# Altium PCB Carrier_Board_Template.PcbDoc
Units mm, origin at the board's own origin, x right, y up, seen from the top; angles counter-clockwise.
Board outline 100 x 100 mm, 2 copper layers (Top Layer, Bottom Layer); 108 components, 74 nets, 425 pads, 0 vias.
Unrouted connection lines stored in the file: 233.
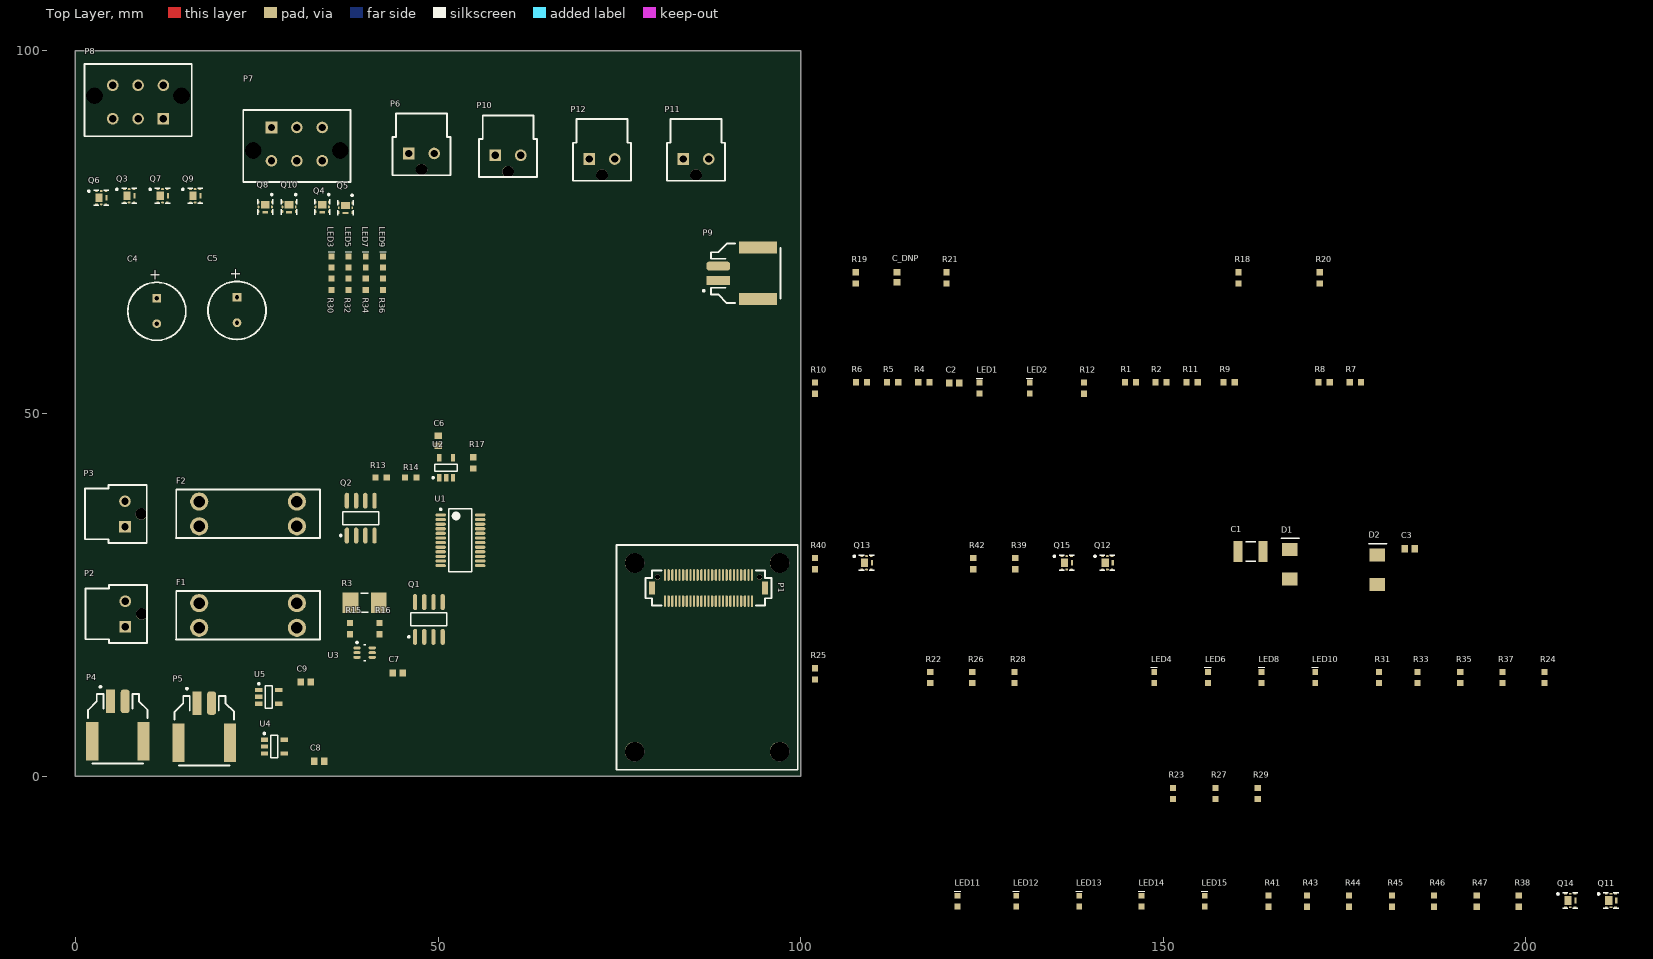
[diagram p0: Top Layer view]
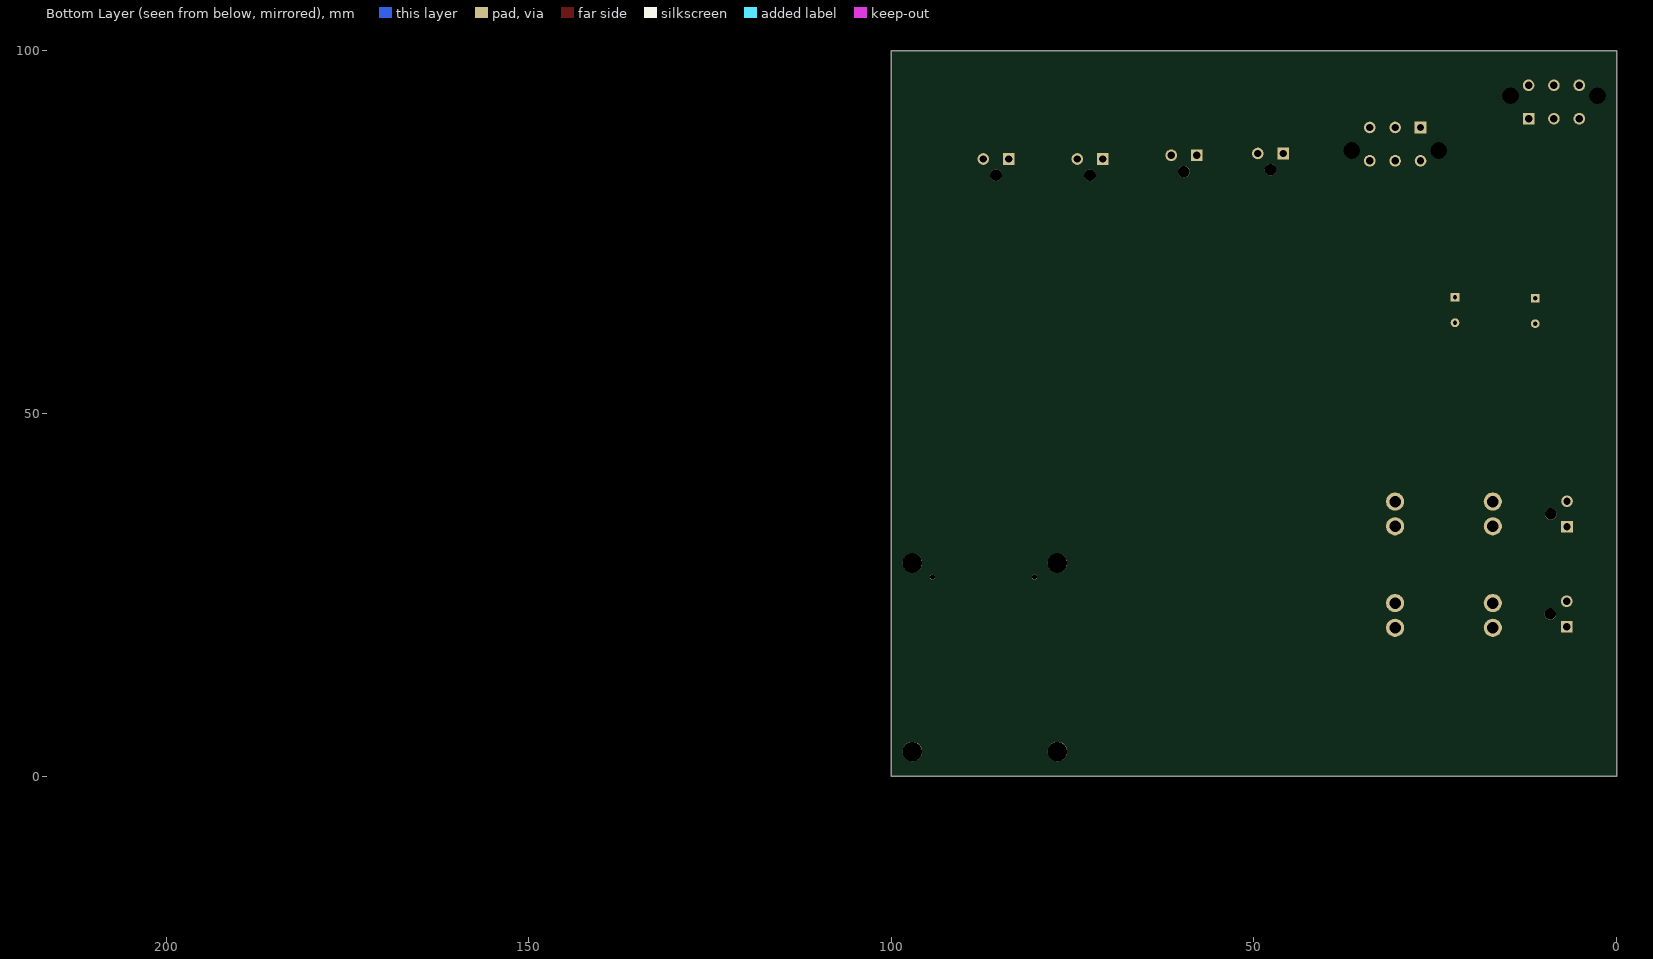
[diagram p1: Bottom Layer view, seen from below]

## Layer stack, top to bottom
Top Solder: solder mask 0.0102, Solder Resist, Dk 3.5
Top Layer: signal copper 0.0356
Dielectric 1: dielectric 0.32, FR-4, Dk 4.8
Bottom Layer: signal copper 0.0356
Bottom Solder: solder mask 0.0102, Solder Resist, Dk 3.5

## Board outline
0,0 100,0 100,100 0,100

## Design rules (kind name [scope] priority, off if disabled: settings)
Clearance [All] p1: gap=0.254
PolygonConnect [All] p1: connectstyle=Relief reliefconductorwidth=0.254 reliefentries=4 polygonreliefangle="90 Angle" airgapwidth=0.254
RoutingVias [All] p1: holewidth=0.711 width=1.27 viastyle="Through Hole" minholewidth=0.711 minwidth=1.27 maxholewidth=0.711 maxwidth=1.27
SolderMaskExpansion [All] p1: expansion=0.102
Width [All] p1: maxlimit=0.254 minlimit=0.254 preferedwidth=0.254
30 further rules are at their usual default settings.

## Classes and differential pairs
component class Sensing: C6 C7 C8 C9 C_DNP P4 P5 R13 R14 R15 R16 R17 R18 R19 R20 R21 U2 U3 U4 U5
component class PowerPath: C1 C2 C3 C4 C5 D1 D2 F1 F2 LED1 LED2 P2 P3 Q1 Q2 R1 R2 R3 R4 R5 R6 R7 R8 R9 R10 R11 R12 U1
component class MiscBoard_Switching: LED11 LED12 LED13 LED14 LED15 P6 P9 P10 P11 P12 Q11 Q12 Q13 Q14 Q15 R38 R39 R40 R41 R42 R43 R44 R45 R46 R47
component class Front&Roof_Enclosure: LED3 LED4 LED5 LED6 LED7 LED8 LED9 LED10 P7 P8 Q3 Q4 Q5 Q6 Q7 Q8 Q9 Q10 R22 R23 R24 R25 R26 R27 R28 R29 R30 R31 R32 R33 R34 R35 R36 R37
component class Controller_Board_Interface: P1

## Components (designator, comment, footprint, x,y, rotation, side; value= is the part's Value field where it differs from the comment)
C1 "CAP CER 22UF 16V ±20% X5R 1210" "CAP, 1210" 162.06,30.988 r0 top
C2 "CAP CER 0.1UF 50V 10% X7R 0603" "CAP, 0603" 121.2,54.2 r0 top
C3 "CAP CER 0.1UF 50V 10% X7R 0603" "CAP, 0603" 184.016,31.34 r0 top
C4 "CAP ALUM 100UF 20% 50V RADIAL" "CAP ALUM 100UF 50V" 11.219,65.888 r270 top
C5 "CAP ALUM 100UF 20% 50V RADIAL" "CAP ALUM 100UF 50V" 22.276,66.009 r270 top
C6 "CAP CER 0.1UF 50V 10% X7R 0603" "CAP, 0603" 50.038,46.228 r90 top
C7 "CAP CER 0.1UF 50V 10% X7R 0603" "CAP, 0603" 44.45,14.224 r0 top
C8 "CAP CER 0.1UF 50V 10% X7R 0603" "CAP, 0603" 33.615,2.032 r0 top
C9 "CAP CER 0.1UF 50V 10% X7R 0603" "CAP, 0603" 31.75,12.954 r0 top
C_DNP "CAP CER 0.1UF 50V 10% X7R 0603" "CAP, 0603" 113.3,68.8 r90 top
D1 "DIODE TVS 15VWM 24.4VC DO-214AA (SMB)" "DO-214AA Diode" 167.46,27.188 r90 top
D2 "DIODE TVS 15VWM 24.4VC DO-214AA (SMB)" "DO-214AA Diode" 179.516,26.44 r90 top
F1 "?A" "FUSE ATO/ATC FUSE HOLDER" 17.069,20.447 r0 top
F2 "?A" "FUSE ATO/ATC FUSE HOLDER" 17.069,34.443 r0 top
LED1 "LED GREEN CLEAR 2V 0603" LED_0603 124.7,52.8 r90 top
LED2 "LED YELLOW CLEAR 2.1V 0603" LED_0603 131.6,52.8 r90 top
LED3 "LED GREEN CLEAR 2V 0603" LED_0603 35.316,70.178 r90 top
LED4 "LED GREEN CLEAR 2V 0603" LED_0603 148.778,12.892 r90 top
LED5 "LED GREEN CLEAR 2V 0603" LED_0603 37.683,70.178 r90 top
LED6 "LED YELLOW CLEAR 2.1V 0603" LED_0603 156.178,12.892 r90 top
LED7 "LED YELLOW CLEAR 2.1V 0603" LED_0603 40.051,70.178 r90 top
LED8 "LED YELLOW CLEAR 2.1V 0603" LED_0603 163.578,12.892 r90 top
LED9 "LED YELLOW CLEAR 2.1V 0603" LED_0603 42.418,70.178 r90 top
LED10 "LED YELLOW CLEAR 2.1V 0603" LED_0603 170.978,12.892 r90 top
LED11 "LED GREEN CLEAR 2V 0603" LED_0603 121.64,-17.96 r90 top
LED12 "LED GREEN CLEAR 2V 0603" LED_0603 129.74,-17.96 r90 top
LED13 "LED YELLOW CLEAR 2.1V 0603" LED_0603 138.44,-17.96 r90 top
LED14 "LED YELLOW CLEAR 2.1V 0603" LED_0603 147.04,-17.96 r90 top
LED15 "LED YELLOW CLEAR 2.1V 0603" LED_0603 155.74,-17.96 r90 top
P1 "CONN 50POS Bergstak Plug 0.02\"" "CONN, Bergstak 50 Pos Plug" 87.308,25.924 r270 top
P2 "CONN 2POS ULTRA-FIT 0.138\"" "CONN, 2POS ULTRA-FIT" 6.883,20.605 r90 top
P3 "CONN 2POS ULTRA-FIT 0.138\"" "CONN, 2POS ULTRA-FIT" 6.833,34.393 r90 top
P4 "CONN 2POS DURA-CLIK 0.079\"" "CONN, 2POS Dura-Click" 4.848,10.306 r0 top
P5 "CONN 2POS DURA-CLIK 0.079\"" "CONN, 2POS Dura-Click" 16.774,10.052 r0 top
P6 "CONN 2POS ULTRA-FIT 0.138\"" "CONN, 2POS ULTRA-FIT" 45.974,85.852 r0 top
P7 "CONN 6POS ULTRA-FIT 0.138\"" "CONN, 6POS ULTRA-FIT" 27.036,89.436 r0 top
P8 "CONN 6POS ULTRA-FIT 0.138\"" "CONN, 6POS ULTRA-FIT" 12.136,90.65 r180 top
P9 "CONN 2POS DURA-CLIK 0.079\"" "CONN, 2POS Dura-Click" 88.646,68.326 r90 top
P10 "CONN 2POS ULTRA-FIT NATURAL COLOR 0.138\"" "CONN, 2POS ULTRA-FIT - NATURAL COLOR" 57.912,85.598 r0 top
P11 "CONN 2POS ULTRA-FIT NATURAL COLOR 0.138\"" "CONN, 2POS ULTRA-FIT - NATURAL COLOR" 83.82,85.09 r0 top
P12 "CONN 2POS ULTRA-FIT 0.138\"" "CONN, 2POS ULTRA-FIT" 70.866,85.09 r0 top
Q1 "MOSFET DUAL P-CH 40V 8A 3.2W 8-SOIC" SOIC8 48.768,21.59 r90 top
Q2 "MOSFET DUAL P-CH 40V 8A 3.2W 8-SOIC" SOIC8 39.37,35.56 r90 top
Q3 "MOSFET N-CH 30V 8.7A 2.1W 6-PQFN (2x2)" "MOSFET N-CH 30V 12A 2mmx2mm PQFN" 7.412,80.01 r0 top
Q4 "MOSFET N-CH 30V 8.7A 2.1W 6-PQFN (2x2)" "MOSFET N-CH 30V 12A 2mmx2mm PQFN" 34.036,78.486 r270 top
Q5 "MOSFET N-CH 30V 8.7A 2.1W 6-PQFN (2x2)" "MOSFET N-CH 30V 12A 2mmx2mm PQFN" 37.247,78.374 r270 top
Q6 "MOSFET N-CH 30V 8.7A 2.1W 6-PQFN (2x2)" "MOSFET N-CH 30V 12A 2mmx2mm PQFN" 3.556,79.756 r0 top
Q7 "MOSFET N-CH 30V 8.7A 2.1W 6-PQFN (2x2)" "MOSFET N-CH 30V 12A 2mmx2mm PQFN" 12.012,80.01 r0 top
Q8 "MOSFET N-CH 30V 8.7A 2.1W 6-PQFN (2x2)" "MOSFET N-CH 30V 12A 2mmx2mm PQFN" 26.162,78.486 r270 top
Q9 "MOSFET N-CH 30V 8.7A 2.1W 6-PQFN (2x2)" "MOSFET N-CH 30V 12A 2mmx2mm PQFN" 16.512,80.01 r0 top
Q10 "MOSFET N-CH 30V 8.7A 2.1W 6-PQFN (2x2)" "MOSFET N-CH 30V 12A 2mmx2mm PQFN" 29.464,78.486 r270 top
Q11 "MOSFET N-CH 30V 8.7A 2.1W 6-PQFN (2x2)" "MOSFET N-CH 30V 12A 2mmx2mm PQFN" 211.74,-17.16 r0 top
Q12 "MOSFET N-CH 30V 8.7A 2.1W 6-PQFN (2x2)" "MOSFET N-CH 30V 12A 2mmx2mm PQFN" 142.3,29.4 r0 top
Q13 "MOSFET N-CH 30V 8.7A 2.1W 6-PQFN (2x2)" "MOSFET N-CH 30V 12A 2mmx2mm PQFN" 109.1,29.4 r0 top
Q14 "MOSFET N-CH 30V 8.7A 2.1W 6-PQFN (2x2)" "MOSFET N-CH 30V 12A 2mmx2mm PQFN" 206.14,-17.16 r0 top
Q15 "MOSFET N-CH 30V 8.7A 2.1W 6-PQFN (2x2)" "MOSFET N-CH 30V 12A 2mmx2mm PQFN" 136.7,29.4 r0 top
R1 "RES 4.7K OHM 1% 1/10W 0603" "RES, 0603" 145.5,54.3 r0 top
R2 "RES 4.7K OHM 1% 1/10W 0603" "RES, 0603" 149.7,54.3 r0 top
R3 "RES 0.003 OHM 1% 1.5W 2010" "RES 2010" 39.878,23.876 r0 top
R4 "RES 1M OHM 1% 1/10W 0603" "RES, 0603" 117,54.3 r0 top
R5 "RES 53.6K OHM 1% 1/10W 0603" "RES, 0603" 112.7,54.3 r0 top
R6 "RES 80.6K OHM 1% 1/10W 0603" "RES, 0603" 108.4,54.3 r0 top
R7 "RES 1M OHM 1% 1/10W 0603" "RES, 0603" 176.5,54.3 r0 top
R8 "RES 29.4K OHM 1% 1/10W 0603" "RES, 0603" 172.2,54.3 r0 top
R9 "RES 80.6K OHM 1% 1/10W 0603" "RES, 0603" 159.1,54.3 r0 top
R10 "RES 255K OHM 1% 1/10W 0603" "RES, 0603" 102,53.5 r90 top
R11 "RES 10K OHM 1% 1/10W 0603" "RES, 0603" 154,54.3 r0 top
R12 "RES 10K OHM 1% 1/10W 0603" "RES, 0603" 139.1,53.5 r90 top
R13 "RES 470K OHM 1% 1/4W 0603" "RES, 0603" 42.164,41.148 r0 top
R14 "RES 140K OHM 1% 1/10W 0603" "RES, 0603" 46.241,41.148 r0 top
R15 "RES 0.0 OHM 1/4W 0603" "RES, 0603" 37.846,20.32 r270 top
R16 "RES 0.0 OHM 1/4W 0603" "RES, 0603" 41.91,20.32 r270 top
R17 "RES 0.0 OHM 1/4W 0603" "RES, 0603" 54.864,43.18 r90 top
R18 "RES 10K OHM 1% 1/10W 0603" "RES, 0603" 160.4,68.7 r90 top
R19 "RES 10K OHM 1% 1/10W 0603" "RES, 0603" 107.6,68.7 r90 top
R20 "RES 0.0 OHM 1/4W 0603" "RES, 0603" 171.6,68.7 r90 top
R21 "RES 0.0 OHM 1/4W 0603" "RES, 0603" 120.1,68.7 r90 top
R22 "RES 10K OHM 1% 1/10W 0603" "RES, 0603" 117.878,13.592 r90 top
R23 "RES 10K OHM 1% 1/10W 0603" "RES, 0603" 151.335,-2.406 r90 top
R24 "RES 10K OHM 1% 1/10W 0603" "RES, 0603" 202.578,13.592 r90 top
R25 "RES 10K OHM 1% 1/10W 0603" "RES, 0603" 102,14.1 r90 top
R26 "RES 10K OHM 1% 1/10W 0603" "RES, 0603" 123.678,13.592 r90 top
R27 "RES 10K OHM 1% 1/10W 0603" "RES, 0603" 157.235,-2.406 r90 top
R28 "RES 10K OHM 1% 1/10W 0603" "RES, 0603" 129.478,13.592 r90 top
R29 "RES 10K OHM 1% 1/10W 0603" "RES, 0603" 163.035,-2.406 r90 top
R30 "RES 4.7K OHM 1% 1/10W 0603" "RES, 0603" 35.297,67.818 r90 top
R31 "RES 4.7K OHM 1% 1/10W 0603" "RES, 0603" 179.778,13.592 r90 top
R32 "RES 4.7K OHM 1% 1/10W 0603" "RES, 0603" 37.671,67.818 r90 top
R33 "RES 4.7K OHM 1% 1/10W 0603" "RES, 0603" 185.078,13.592 r90 top
R34 "RES 4.7K OHM 1% 1/10W 0603" "RES, 0603" 40.044,67.818 r90 top
R35 "RES 4.7K OHM 1% 1/10W 0603" "RES, 0603" 190.978,13.592 r90 top
R36 "RES 4.7K OHM 1% 1/10W 0603" "RES, 0603" 42.418,67.818 r90 top
R37 "RES 4.7K OHM 1% 1/10W 0603" "RES, 0603" 196.778,13.592 r90 top
R38 "RES 10K OHM 1% 1/10W 0603" "RES, 0603" 199.04,-17.26 r90 top
R39 "RES 10K OHM 1% 1/10W 0603" "RES, 0603" 129.6,29.3 r90 top
R40 "RES 10K OHM 1% 1/10W 0603" "RES, 0603" 102,29.3 r90 top
R41 "RES 10K OHM 1% 1/10W 0603" "RES, 0603" 164.54,-17.26 r90 top
R42 "RES 10K OHM 1% 1/10W 0603" "RES, 0603" 123.8,29.3 r90 top
R43 "RES 4.7K OHM 1% 1/10W 0603" "RES, 0603" 169.84,-17.26 r90 top
R44 "RES 4.7K OHM 1% 1/10W 0603" "RES, 0603" 175.64,-17.26 r90 top
R45 "RES 4.7K OHM 1% 1/10W 0603" "RES, 0603" 181.54,-17.26 r90 top
R46 "RES 4.7K OHM 1% 1/10W 0603" "RES, 0603" 187.34,-17.26 r90 top
R47 "RES 4.7K OHM 1% 1/10W 0603" "RES, 0603" 193.24,-17.26 r90 top
U1 "IC OR CONTROLLER SOURCE SELECT 24SSOP" "IC OR CTRLR SRC SELECT 24SSOP" 53.086,32.512 r0 top
U2 "IC OP AMP GEN PURPOSE RR 10MHZ SOT-23-5" "IC OP AMP GP RR 10MHZ SOT-23-5" 51.12,42.523 r90 top
U3 "IC CURRENT AMPLIFIER SC70-6" "IC OP AMP CURR SENSE 80KHZ SC70-6" 39.878,17.018 r0 top
U4 "IC OP AMP GEN PURPOSE RR 10MHZ SOT-23-5" "IC OP AMP GP RR 10MHZ SOT-23-5" 27.432,4.064 r0 top
U5 "IC OP AMP GEN PURPOSE RR 10MHZ SOT-23-5" "IC OP AMP GP RR 10MHZ SOT-23-5" 26.67,10.922 r0 top

## Footprints (in the part's own frame and the unit in brackets; to place one, negate y for a bottom-side part, rotate by r counter-clockwise, add the part's x,y. Pads: shape width x height; smd on the part's side, far side on the other; paste and mask are expansions set on the pad)
"CAP ALUM 100UF 50V" [mm] "CAP ALUM 100UF 20% 50V RADIAL"
  rect 1.2x1.2 hole 0.6: 1(0,0)
  round 1.2 hole 0.6: 2(3.5,0)
  silkscreen extent -2.2,-4 5.8,4, body extent -2.45,-4.25 6.05,4.25, height 12.5
"CAP, 0603" [mm] "Chip Capacitor, 2-Leads, Body 1.60x0.81mm, IPC Medium Density"
  rect 0.9x1 smd mask+0.076: 1(-0.675,0) 2(0.675,0)
  body extent -0.87,-0.48 0.87,0.48, height 0.9
"CAP, 1210" [mm] "Chip Capacitor, 2-Leads, Body 3.20x2.50mm, IPC Low Density"
  rect 1.25x2.9 smd: 1(-1.725,0) 2(1.725,0)
  silkscreen extent -0.7,-1.35 0.7,1.35, body extent -1.8,-1.4 1.8,1.4, height 2.8
"CONN, 2POS Dura-Click" [mm] "WM7169CT-ND"
  rect 1.2x3.2 smd: 1(0,0)
  rrect50% 1.2x3.2 smd: 2(2,0)
  rect 1.7x5.3 smd: ""(-2.55,-5.48) ""(4.55,-5.48)
  silkscreen extent -3.1,-8.6 5.1,2.13, body extent -3,-8.4 5,1, height 6.39
"CONN, 2POS ULTRA-FIT" [mm] "2 Positions Header, Shrouded Connector 0.138\" (3.50mm) Through Hole Gold"
  rect 1.6x1.6 hole 1.02: 1(0,0)
  round 1.6 hole 1.02: 2(3.5,0)
  round 1.6 hole 1.6: ""(1.75,-2.25)
  silkscreen extent -2.25,-3 5.75,5.5, body extent -2.71,-2.85 6.29,5.82, height 13.85
"CONN, 2POS ULTRA-FIT - NATURAL COLOR" [mm] "2 Positions Header, Shrouded Connector 0.138\" (3.50mm) Through Hole Gold"
  rect 1.6x1.6 hole 1.02: 1(0,0)
  round 1.6 hole 1.02: 2(3.5,0)
  round 1.6 hole 1.6: ""(1.75,-2.25)
  silkscreen extent -2.25,-3 5.75,5.5, body extent -2.71,-2.85 6.29,5.82, height 13.85
"CONN, 6POS ULTRA-FIT" [mm]
  rect 1.6x1.6 hole 1.02: 1(0,0)
  round 1.6 hole 1.02: 2(3.5,0) 3(7,0) 4(0,-4.6) 5(3.5,-4.6) 6(7,-4.6)
  round 0 hole 2.3: ""(-2.5,-3.18) ""(9.5,-3.18)
  silkscreen extent -3.9,-7.53 10.9,2.42, body extent -3.55,-8.25 10.55,5.66, height 13.9
"CONN, Bergstak 50 Pos Plug" [mm] "Bergstak 50 Position Plug"
  rect 1.6x0.3 smd: 1(1.8,6)
  oval 1.6x0.3 smd: 2(1.8,5.5) 3(1.8,5) 4(1.8,4.5) 5(1.8,4) 6(1.8,3.5) 7(1.8,3) 8(1.8,2.5) 9(1.8,2) 10(1.8,1.5) 11(1.8,1) 12(1.8,0.5) 13(1.8,0) 14(1.8,-0.5) 15(1.8,-1) 16(1.8,-1.5) 17(1.8,-2) 18(1.8,-2.5) 19(1.8,-3) 20(1.8,-3.5) 21(1.8,-4) 22(1.8,-4.5) 23(1.8,-5) 24(1.8,-5.5) 25(1.8,-6) 26(-1.8,-6) 27(-1.8,-5.5) 28(-1.8,-5) 29(-1.8,-4.5) 30(-1.8,-4) 31(-1.8,-3.5) 32(-1.8,-3) 33(-1.8,-2.5) 34(-1.8,-2) 35(-1.8,-1.5) 36(-1.8,-1) 37(-1.8,-0.5) 38(-1.8,0) 39(-1.8,0.5) 40(-1.8,1) 41(-1.8,1.5) 42(-1.8,2) 43(-1.8,2.5) 44(-1.8,3) 45(-1.8,3.5) 46(-1.8,4) 47(-1.8,4.5) 48(-1.8,5) 49(-1.8,5.5) 50(-1.8,6)
  round 0.7 hole 0.7: ""(-1.5,7.05) ""(-1.5,-7.05)
  rect 1.8x0.8 smd: ""(0,7.8) ""(0,-7.8)
  silkscreen extent -2.4,-8.7 2.4,8.7
"DO-214AA Diode" [mil] "Zener Diode 16V 5W SMBJ5353B-TP"
  rect 70x85 smd: 1(0,0) 2(160,0)
  silkscreen extent 220,-51 220,46
"FUSE ATO/ATC FUSE HOLDER" [mm]
  round 2.5 hole 1.6: 1(0,3.4) 2(13.47,3.4) 3(0,0) 4(13.47,0)
  silkscreen extent -3.18,-1.6 16.64,5.06
"IC OP AMP CURR SENSE 80KHZ SC70-6" [mm]
  oval 1x0.4 smd: 1(-1.05,0.65) 2(-1.05,0) 3(-1.05,-0.65) 4(1.05,-0.65) 5(1.05,0) 6(1.05,0.65)
  silkscreen extent -1.17,-1.1 0.15,1.52, body extent -1.05,-1.1 1.05,1.1, height 1.1
"IC OP AMP GP RR 10MHZ SOT-23-5" [mm] "SOT23, 5-Leads, Body 2.90x2.80mm, Pitch 0.95mm, IPC Medium Density"
  rect 1x0.6 smd: 1(-1.375,0.95) 2(-1.375,0) 3(-1.375,-0.95) 4(1.375,-0.95) 5(1.375,0.95)
  silkscreen extent -1.5,-1.55 0.5,1.92, body extent -1.5,-1.53 1.5,1.53, height 1.45
"IC OR CTRLR SRC SELECT 24SSOP" [mm] "LTC4417"
  oval 1.45x0.45 smd: 1(-2.725,3.492) 2(-2.725,2.857) 3(-2.725,2.222) 4(-2.725,1.587) 5(-2.725,0.953) 6(-2.725,0.318) 7(-2.725,-0.318) 8(-2.725,-0.953) 9(-2.725,-1.587) 10(-2.725,-2.222) 11(-2.725,-2.857) 12(-2.725,-3.492) 13(2.725,-3.492) 14(2.725,-2.857) 15(2.725,-2.222) 16(2.725,-1.587) 17(2.725,-0.953) 18(2.725,-0.318) 19(2.725,0.318) 20(2.725,0.953) 21(2.725,1.587) 22(2.725,2.222) 23(2.725,2.857) 24(2.725,3.492)
  silkscreen extent -2.85,-4.35 1.6,4.39, body extent -3,-4.35 3,4.35, height 1.75
LED_0603 [mm]
  rect 0.8x0.8 smd: 1(-0.05,0.01) 2(1.45,0.01)
  silkscreen extent 2.09,-0.43 2.09,0.48, body extent -0.1,-0.39 1.5,0.41, height 0.55
"MOSFET N-CH 30V 12A 2mmx2mm PQFN" [mm] "PQFN, 6-Leads, Body 2.00x2.00mm, Pitch 0.65mm/0.50mm, Thermal Pad 1.00x1.20mm, IPC Medium Density"
  oval 0.4x0.25 smd: 1(-0.65,-0.925) 2(0,-0.925) 3(0.65,-0.925) 4(0.65,0.925) 5(0,0.925) 6(-0.65,0.925)
  rect 1x1.2 smd: 7(-0.3,0)
  rect 0.3x0.79 smd: 8(0.74,0)
  silkscreen extent -1.82,-1.05 1.05,1.05, body extent -1.05,-1.05 1.05,1.05, height 1
"RES 2010" [mm] "Chip Resistor, 2-Leads, Body 5.08x2.54mm, IPC Medium Density"
  rect 2.15x2.8 smd: 1(-1.95,0) 2(1.95,0)
  silkscreen extent -0.5,-1.3 0.5,1.3, body extent -2.67,-1.4 2.67,1.4, height 1.04
"RES, 0603" [mm] "Chip Resistor, 2-Leads, Body 1.60x0.80mm, IPC Medium Density"
  rect 0.85x0.85 smd: 1(-0.775,0) 2(0.775,0)
  body extent -0.8,-0.4 0.8,0.4, height 0.55
SOIC8 [mm]
  oval 2.2x0.6 smd: 1(-2.394,1.935) 2(-2.394,0.665) 3(-2.394,-0.605) 4(-2.394,-1.875) 5(2.406,-1.875) 6(2.406,-0.605) 7(2.406,0.665) 8(2.406,1.935)
  silkscreen extent -2.52,-2.47 0.91,2.91, body extent -1.99,-2.47 2.01,2.53, height 1.75

## Part data
C1: "22µF ±20% 16V Ceramic Capacitor X5R 1210 (3225 Metric)"
C2 C3 C6 C7 C8 C9 C_DNP: "0.10µF ±10% 50V Ceramic Capacitor X7R 0603 (1608 Metric)"
C4 C5: "100µF 50V Aluminum Capacitors Radial, Can 74 mOhm @ 100kHz 3000 Hrs @ 105°C"
D1 D2: "TVS DIODE 15VWM 24.4VC SMB"
F1 F2: library part "FUSE ATO FUSE HOLDER", "Fuse Block 30A 500V 1 Circuit Blade PCB"
LED1 LED3 LED4 LED5 LED11 LED12: "Green 572nm LED Indication - Discrete 2V 0603 (1608 Metric)"
P1: "50 Position Connector Plug, Outer Shroud Contacts Surface Mount Gold"
P2 P3 P6 P12: "2 Positions Header, Shrouded Connector 0.138\" (3.50mm) Through Hole Gold"
P4 P5 P9: "2 Positions Header, Shrouded Connector 0.079\" (2.00mm) Surface Mount, Right Angle Tin"
P10 P11: "2 Positions Header, Shrouded Connector 0.138\" (3.50mm) Through Hole"
Q1 Q2: "Mosfet Array 2 P-Channel (Dual) 40V 8A 3.2W Surface Mount 8-SO"
R1 R2 R30 R31 R32 R33 R34 R35 R36 R37 R43 R44 R45 R46 R47: "4.7k Ohm ±1% 0.1W, 1/10W Chip Resistor 0603 (1608 Metric) Moisture Resistant Thick Film"
R3: "0.003 Ohm ±1% 1.5W Chip Resistor 2010 (5025 Metric) Current Sense, Moisture Resistant Metal Foil"
R4 R7: "1M Ohm ±1% 0.1W, 1/10W Chip Resistor 0603 (1608 Metric) Moisture Resistant Thick Film"
R5: "53.6k Ohm ±1% 0.1W, 1/10W Chip Resistor 0603 (1608 Metric) Moisture Resistant Thick Film"
R6 R9: "80.6k Ohm ±1% 0.1W, 1/10W Chip Resistor 0603 (1608 Metric) Moisture Resistant Thick Film"
R8: "29.4k Ohm ±1% 0.1W, 1/10W Chip Resistor 0603 (1608 Metric) Moisture Resistant Thick Film"
R10: "255k Ohm ±1% 0.1W, 1/10W Chip Resistor 0603 (1608 Metric) Moisture Resistant Thick Film"
R11 R12 R18 R19 R22 R23 R24 R25 R26 R27 R28 R29 R38 R39 R40 R41 R42: "RES SMD 10K OHM 1% 1/10W 0603"
R13: "RES SMD 470K OHM 1% 1/4W 0603"
R15 R16 R17 R20 R21: "RES SMD 0.0 OHM JUMPER 1/4W 0603"
U1: "OR Controller Source Selector Switch P-Channel 3:1 24-SSOP"
U2 U4 U5: "General Purpose Amplifier 1 Circuit Rail-to-Rail SOT-23-5"
U3: "Current Sense Amplifier 1 Circuit SC-70-6"

## Free pads (board coordinates)
  round 2.7 hole 2.7: ""(77.114,3.376) ""(77.114,29.376) ""(97.114,3.376) ""(97.114,29.376)

## Nets (pads, with @x,y where several pads share a name; then routed paths per layer and width w, separated by ;. In a path a pad name is that pad's centre, name@x,y a point inside that pad or via, vN(x,y) a via of type N, cw(c..) or ccw(c..) an arc to the next point about the centre after c; other vN are vias at no path point)
3V3: C6.1 C7.1 C8.1 C9.1 P1.40 P1.41 P1.42 P1.43 P1.44 P1.45 P4.1 P5.1 R11.1 R12.1 U2.5 U3.3 U4.5 U5.5
+12V: P1.47 P1.48 P1.49 P1.50
ARRAY_SENSE_GND: LED7.2 P7.5 Q10.1 Q10.2 Q10.5 Q10.6 Q10.7
BAT_BOX_GND: LED11.2 P6.2 Q11.1 Q11.2 Q11.5 Q11.6 Q11.7
DRIVER_DISP_GND: LED6.2 P8.4 Q7.1 Q7.2 Q7.5 Q7.6 Q7.7
GND: C1.2 C2.2 C3.2 C4.2 C5.2 C6.2 C7.2 C8.2 C9.2 D1.2 D2.2 LED1.2 LED2.2 P1.1 P1.2 P1.3 P1.4 P1.26 P1.27 P1.28 P1.29 P2.2 P3.2 Q3.4 Q3.8 Q4.4 Q4.8 Q5.4 Q5.8 Q6.4 Q6.8 Q7.4 Q7.8 Q8.4 Q8.8 Q9.4 Q9.8 Q10.4 Q10.8 Q11.4 Q11.8 Q12.4 Q12.8 Q13.4 Q13.8 Q14.4 Q14.8 Q15.4 Q15.8 R6.2 R9.2 R10.2 R14.2 R18.2 R19.2 R22.2 R23.2 R24.2 R25.2 R26.2 R27.2 R28.2 R29.2 R38.2 R39.2 R40.2 R41.2 R42.2 U1.8 U1.9 U1.13 U1.16 U1.17 U1.22 U2.2 U3.1 U3.2 U4.2 U5.2
HORN_GND: LED8.2 P8.5 Q9.1 Q9.2 Q9.5 Q9.6 Q9.7
LIGHTS_GND: LED10.2 P8.6 Q6.1 Q6.2 Q6.5 Q6.6 Q6.7
MOTOR_INT_GND: LED12.2 P11.2 Q14.1 Q14.2 Q14.5 Q14.6 Q14.7
NetC1_1: C1.1 C_DNP.1 D1.1 F1.2 F1.4 R3.1 R15.1
NetC2_1: C2.1 D2.1 F2.2 F2.4 Q2.7 Q2.8 R4.1 U1.23
NetF1_1: F1.1 F1.3 P2.1
NetF2_1: F2.1 F2.3 P3.1
NetLED1_1: LED1.1 R1.2
NetLED2_1: LED2.1 R2.2
NetLED3_1: LED3.1 R30.2
NetLED4_1: LED4.1 R31.2
NetLED5_1: LED5.1 R32.2
NetLED6_1: LED6.1 R33.2
NetLED7_1: LED7.1 R34.2
NetLED8_1: LED8.1 R35.2
NetLED9_1: LED9.1 R36.2
NetLED10_1: LED10.1 R37.2
NetLED11_1: LED11.1 R43.2
NetLED12_1: LED12.1 R44.2
NetLED13_1: LED13.1 R45.2
NetLED14_1: LED14.1 R46.2
NetLED15_1: LED15.1 R47.2
NetP4_2: P4.2 R18.1 U4.3
NetP5_2: P5.2 R19.1 U5.3
NetQ1_1: Q1.1 Q1.3 U1.21
NetQ1_2: Q1.2 Q1.4 U1.20
NetQ2_1: Q2.1 Q2.3 U1.19
NetQ2_2: Q2.2 Q2.4 U1.18
NetR4_2: R4.2 R5.1 U1.6
NetR5_2: R5.2 R6.1 U1.7
NetR7_2: R7.2 R8.1 U1.4
NetR8_2: R8.2 R9.1 U1.5
NetR10_1: R10.1 U1.3
NetR13_2: R13.2 R14.1 U2.3
NetR15_2: R15.2 U3.4
NetR16_2: R16.2 U3.5
NetR17_1: R17.1 U2.1
NetR20_1: R20.1 U4.1
NetR21_1: R21.1 U5.1
PA0/ADCIN_0: P1.25 R17.2 U2.4
PA1/ADCIN_1: P1.24 U3.6
PA2/ADCIN_2: P1.23 R20.2 U4.4
PA3/ADCIN_3: P1.22 R21.2 U5.4
PA4: P1.21 Q13.3 R40.1
PA5: P1.20 Q15.3 R42.1
PA6: P1.19 Q12.3 R39.1
PA7: P1.18 Q14.3 R41.1
PA8/\S\H\D\N: P1.7 U1.2
PA9/\V\A\L\I\D\2: P1.6 R12.2 U1.11
PA10/\V\A\L\I\D\1: P1.5 R11.2 U1.10
PB0: P1.17 Q11.3 R38.1
PB1: P1.16 Q6.3 R25.1
PB2: P1.15 Q9.3 R28.1
PB10: P1.14 Q7.3 R26.1
PB11: P1.13 Q3.3 R22.1
PB12: P1.11 Q5.3 R24.1
PB13: P1.10 Q10.3 R29.1
PB14: P1.9 Q8.3 R27.1
PB15: P1.8 Q4.3 R23.1
PJB_FAN_GND: LED13.2 P9.2 Q12.1 Q12.2 Q12.5 Q12.6 Q12.7
PROTECT_SPARE_GND: LED14.2 P12.2 Q15.1 Q15.2 Q15.5 Q15.6
PROTECTED_12V: C4.1 C5.1 P6.1 P7.1 P8.1 P12.1 Q1.5 Q1.6 Q2.5 Q2.6 R1.1 R13.1 R30.1 R31.1 R32.1 R43.1 R46.1 U1.15
REAR_CAM_DISP_GND: LED9.2 P7.6 Q5.1 Q5.2 Q5.5 Q5.6 Q5.7
STROBE_GND: LED5.2 P7.4 Q8.1 Q8.2 Q8.5 Q8.6 Q8.7
TELEMETRY_GND: LED3.2 P7.3 Q4.1 Q4.2 Q4.5 Q4.6 Q4.7
THEMIS_GND: LED4.2 P8.3 Q3.1 Q3.2 Q3.5 Q3.6 Q3.7
UNPROTECT_SPARE_GND: LED15.2 P10.2 Q13.1 Q13.2 Q13.5 Q13.6 Q13.7
UNPROTECTED_12V: C3.1 C_DNP.2 P7.2 P8.2 P9.1 P10.1 P11.1 Q1.7 Q1.8 R2.1 R3.2 R7.1 R16.1 R33.1 R34.1 R35.1 R36.1 R37.1 R44.1 R45.1 R47.1 U1.24
pads on no net: P1. P1.12 P1.30 P1.31 P1.32 P1.33 P1.34 P1.35 P1.36 P1.37 P1.38 P1.39 P1.46 P2. P3. P4. P5. P6. P7. P8. P9. P10. P11. P12. Q15.7 U1.1 U1.12 U1.14

## Silkscreen, mask and mechanical layers (free items; w line width, h text height)
Top Overlay:
  lines w0.254: 74.614,0.876 74.614,31.876 99.614,31.876 99.614,0.876 74.614,0.876

## Text inside footprints (layer, text, board x,y; h text height)
C4: Top Overlay "+" at 10.419,69.988 h1.52 r270
C5: Top Overlay "+" at 21.476,70.109 h1.52 r270